# Altium PCB USB-eVo.PcbDoc
Units mm, origin at the board's own origin, x right, y up, seen from the top; angles counter-clockwise.
Board outline 40 x 16 mm, 2 copper layers (Top Layer, Bottom Layer), stack 1.595 mm thick; 20 components, 25 nets, 102 pads, 330 vias.
Unrouted connection lines stored in the file: 1.
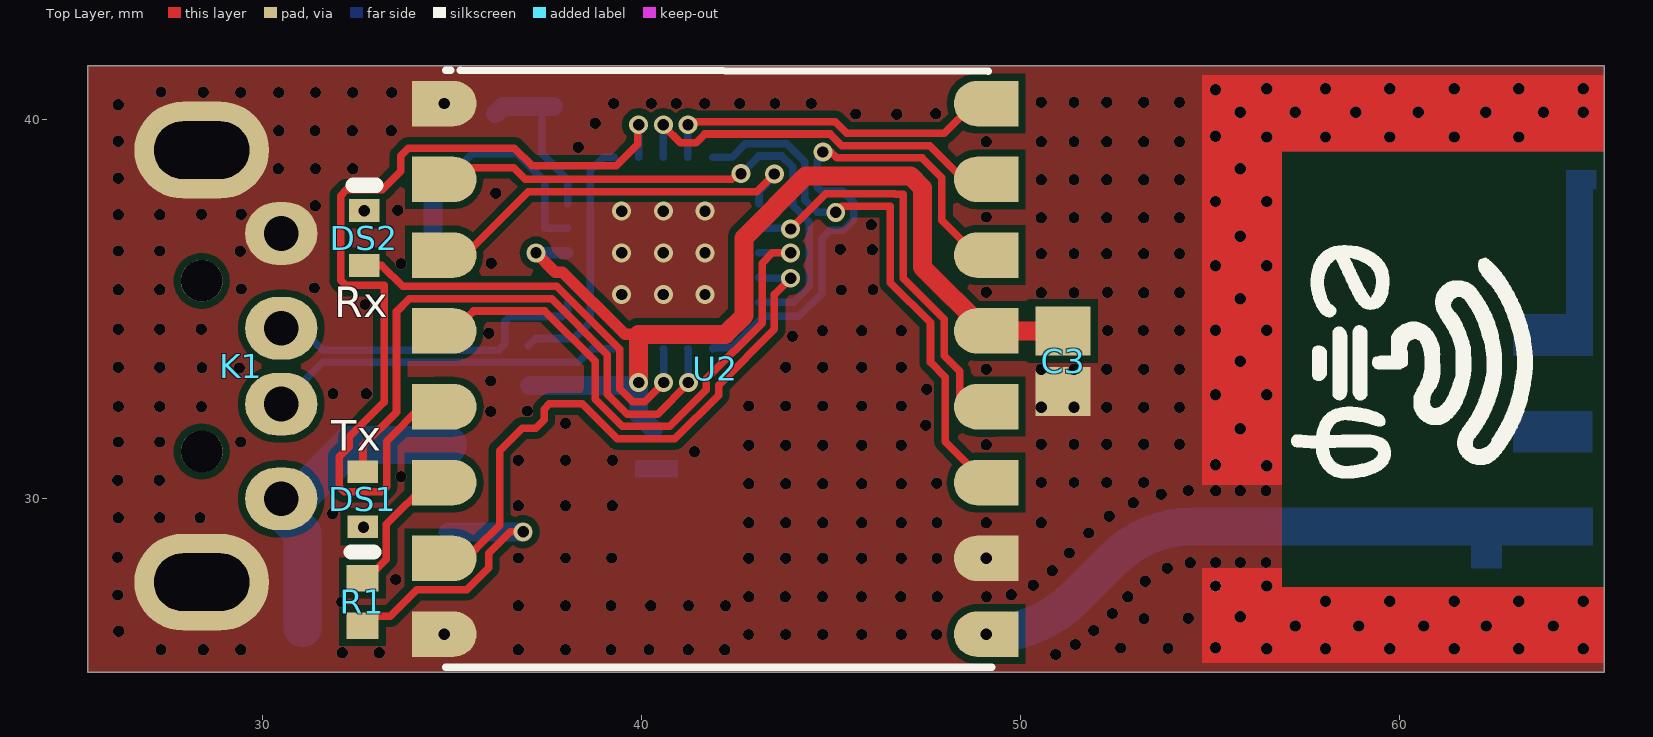
[diagram p0: Top Layer view]
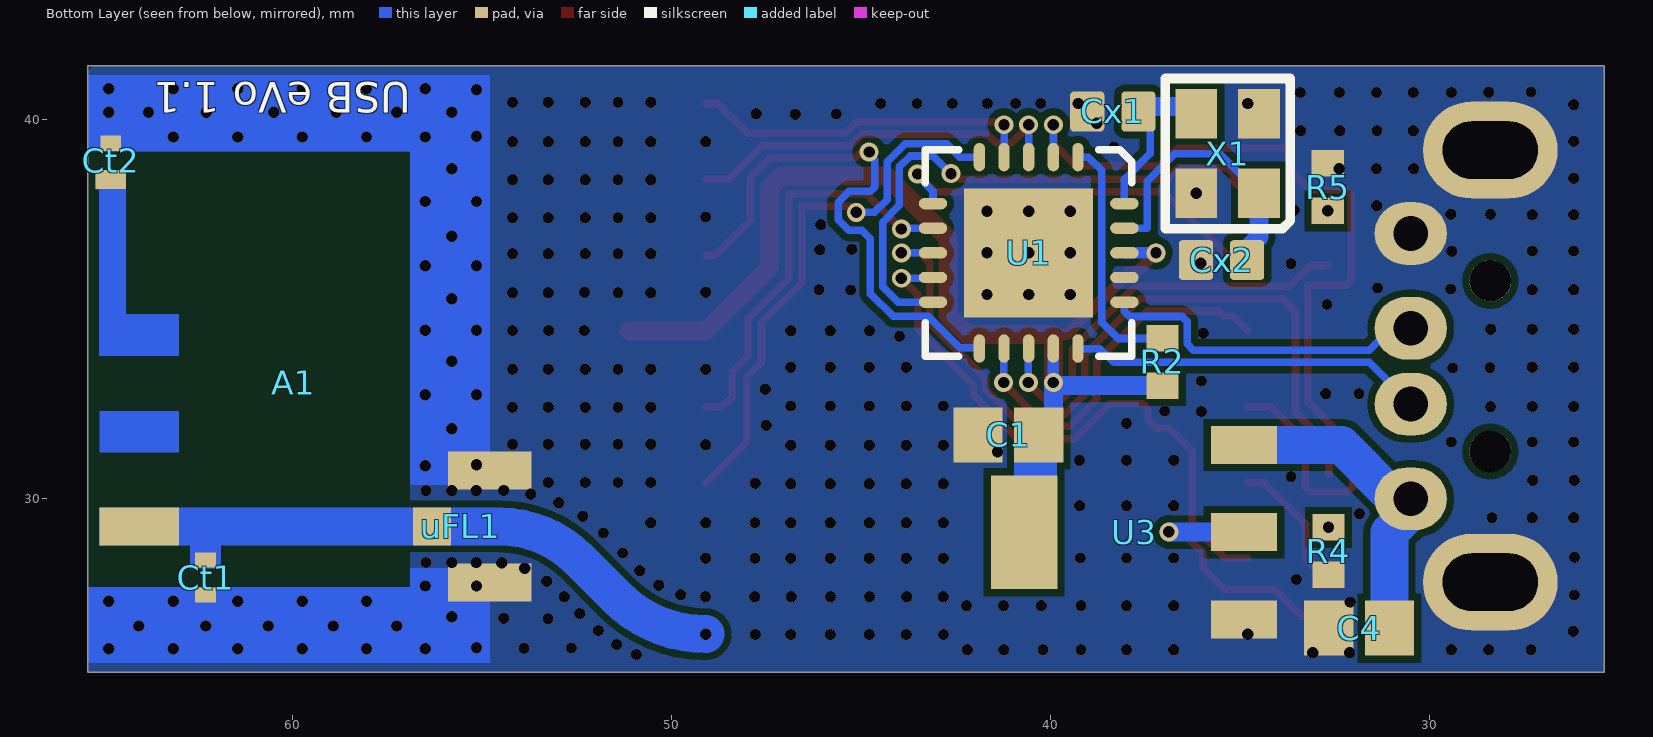
[diagram p1: Bottom Layer view, seen from below]

## Layer stack, top to bottom
Top Solder: solder mask 0.0254, Solder Resist, Dk 3.5
Top Layer: signal copper 0.0356
Dielectric 1: core 1.524, FR-4, Dk 4.6
Bottom Layer: signal copper 0.0356
Bottom Solder: solder mask 0.0254, Solder Resist, Dk 3.5

## Board outline
25.4,25.4 65.4,25.4 65.4,41.4 25.4,41.4

## Design rules (kind name [scope] priority, off if disabled: settings)
Clearance [All] p1: gap=0.125 ignorepadtopadclearanceinfootprint=FALSE except(0: Arc-Hole Track-Hole SMDPad-Hole THPad-Hole Via-Hole Fill-Hole Poly-Hole Region-Hole Text-Hole; 0.185: Arc-Poly Track-Poly SMDPad-Poly THPad-Poly Via-Poly Fill-Poly Poly-Poly)
ComponentClearance ComponentClearance_1 [All] p2: gap=0.125 collisioncheckmode=3 verticalgap=0.254 showdistances=FALSE
FanoutControl Fanout_LCC [IsLCC] p1: bgadir=Out bgaviamode=Centered fanoutstyle=Auto fanoutdirection=Alternating viagrid=0.025 // Fanout_LCC (Default Rule)
FanoutControl Fanout_BGA [IsBGA] p2: bgadir=Out bgaviamode=Centered fanoutstyle=Auto fanoutdirection=Alternating viagrid=0.025 // Fanout_BGA (Default Rule)
FanoutControl Fanout_Small [(CompPinCount < 5)] p3: bgadir=Out bgaviamode=Centered fanoutstyle=Auto fanoutdirection=OutThenIn viagrid=0.025 // Fanout_Small (Default Rule)
FanoutControl Fanout_SOIC [IsSOIC] p4: bgadir=Out bgaviamode=Centered fanoutstyle=Auto fanoutdirection=Alternating viagrid=0.025 // Fanout_SOIC (Default Rule)
Height Height_1 [All] p2: minheight=0 maxheight=25.4 prefheight=12.7
HoleSize [All] p1: absolutevalues=TRUE maxlimit=2.54 minlimit=0.2 maxpercent=80.000 minpercent=20.000
MinimumSolderMaskSliver [All] p1: minsoldermaskwidth=0.05
PlaneConnect [All] p1: planeconnectstyle=Direct reliefexpansion=0.508 reliefentries=4 reliefconductorwidth=0.254 reliefairgap=0.254
PolygonConnect [All] p1: connectstyle=Direct reliefconductorwidth=0.254 reliefentries=4 polygonreliefangle="90 Angle" airgapwidth=0.254
RoutingVias [All] p1: holewidth=0.3 width=0.5 viastyle="Through Hole" minholewidth=0.2 minwidth=0.2 maxholewidth=1 maxwidth=1
SilkToBoardRegionClearance SilkToBoardRegionClearance_1 [All] p2:
SilkToSolderMaskClearance [IsPad] p1: minsilkscreentomaskgap=0.1 clearancetoexposedcopper=TRUE
SolderMaskExpansion [All] p1: expansion=0 istentingtop=FALSE
Width [All] p1: maxlimit=2 minlimit=0.2 preferedwidth=0.2
22 further rules are at their usual default settings.

## Components (designator, comment, footprint, x,y, rotation, side; value= is the part's Value field where it differs from the comment)
A1 "868/915 Mhz" M620720 65.1,28.75 r90 bottom locked
C1 "100nF" CAPC2013X88X50NL20T25 41.116,31.668 r180 bottom
C3 "100nF" CAPC2013X88X50NL20T25 51.13,33.61 r90 top
C4 "100nF" CAPC2013X88X50NL20T25 31.86,26.57 r180 bottom
Ct1 "47pF" SMD0402 62.295,27.904 r270 bottom
Ct2 "6.7pF" SMD0402 64.799,38.903 r270 bottom
Cx1 "30pF" PCB-EK4STCKT8HTL49C36KEC-1 38.36,40.2 r180 bottom
Cx2 "30pF" PCB-EK4STCKT8HTL49C36KEC-1 35.49,36.28 r180 bottom
DS1 "LED-0603" VISH-TLMX1100-2_V 32.65,29.97 r270 top
DS2 "LED-0603" VISH-TLMX1100-2_V 32.69,36.86 r90 top
K1 "USB-A" USB-A-H 28.4,33.48 r0 top locked
R1 "2k2" RESC1608X55X30LL15T15 32.64,27.26 r90 top
R2 "2k2" RESC1608X55X30LL15T15 37.05,33.59 r90 bottom
R4 "2k2" RESC1608X55X30LL15T15 32.67,28.6 r270 bottom
R5 "2k2" RESC1608X55X30LL15T15 32.69,38.205 r90 bottom
U1 "MCP2210" QFN-MQ20_N 40.58,36.47 r270 bottom locked
U2 "LoRa1276-C1" PCB-A2VA5FQQIKHNLZOD9I25-1 33.95,25.41 r0 top locked
U3 "AMS1117-3.3" MP04A_N 37.8,29.1 r0 bottom locked
uFL1 "50ohm" HRS-U.FL-R-SMT_V 54.8,29.25 r270 bottom
X1 "12Mhz" PCB-O7TDNPTWBJGDFBSKC48Q-1 35.33,39.09 r90 bottom locked

## Footprints (in the part's own frame and the unit in brackets; to place one, negate y for a bottom-side part, rotate by r counter-clockwise, add the part's x,y. Pads: shape width x height; smd on the part's side, far side on the other; paste and mask are expansions set on the pad)
CAPC2013X88X50NL20T25 [mm] "CAPC2013X88X50NL20T25"
  rect 1.3x1.45 smd: 1(-0.8,0) 2(0.8,0)
  body extent -1.1,-0.72 1.1,0.72, height 0.88
HRS-U.FL-R-SMT_V [mm] "SMD, 3-Leads, Body 2.6x2.6mm"
  rect 1x2.2 smd: 1(-1.475,0) 2(1.475,0)
  rect 1x1 smd: 3(0,-1.525)
  body extent -1.3,-1.3 1.3,1.3, height 1.25
M620720 [mm]
  rect 1x2.1 smd: 1(0.5,-1.05)
  rect 0.5x0.8 smd: 2(9.65,-0.3)
  round 0.3 hole 0.3 mask+0.102: GND(-1.07,-9.95) GND(2.13,-9.95)
  Top Layer region: 2.45,0 3.55,0 3.55,-2.1 2.45,-2.1
  Top Layer region: 9.4,0 9.9,0 9.9,-0.7 9.4,-0.7
  Top Layer region: 12.4,0.3 12.4,-10.3 1.6,-10.3 1.6,-8.2 10.4,-8.2 10.4,0.3
  Top Layer region: -3.1,0.3 -1.1,0.3 -1.1,-8.2 -0.6,-8.2 -0.6,-10.3 -3.1,-10.3
  Top Layer region: 5,0 9.4,0 9.4,0.1 9.9,0.1 9.9,0 9.9,-0.7 6.1,-0.7 6.1,-2.1 5,-2.1
  Top Layer region: 0,0 1,0 1,-7.7 0,-7.7 0,-3.2 -0.6,-3.2 -0.6,-2.4 0,-2.4
  Bottom Layer region: -1.1,0.3 -1.1,-8.2 -0.6,-8.2 -0.6,-10.3 -3.1,-10.3 -3.1,0.3
  Bottom Layer region: 1.6,-8.2 1.6,-10.3 12.4,-10.3 12.4,0.3 10.4,0.3 10.4,-8.2
  body extent -0.1,-2.2 6.2,0.1, height 1
MP04A_N [mm] "SOT223, 4-Leads, Body 6.5x3.5mm, Pitch 2.3mm, Lead Span 7mm, IPC Medium Density"
  rect 1.75x1 smd: 1(-2.9,2.3) 2(-2.9,0) 3(-2.9,-2.3)
  rect 1.75x3 smd: 2(2.9,0)
  body extent -3.53,-3.3 3.54,3.2, height 1.6
PCB-A2VA5FQQIKHNLZOD9I25-1 [mm]
  rect 0.85x1.2 smd: 1(0.42,14.999) 2(0.42,12.999) 3(0.42,10.999) 4(0.42,8.999) 5(0.42,6.999) 6(0.42,4.999) 7(0.42,2.999) 8(0.42,0.999) 9(15.574,0.999) 10(15.574,2.999) 11(15.574,4.999) 12(15.574,6.999) 13(15.574,8.999) 14(15.574,10.999) 15(15.574,12.999) 16(15.574,14.999)
  oval 1.7x1.2 smd: 1(0.85,15) 2(0.85,13) 3(0.85,11) 4(0.85,9) 5(0.85,7) 6(0.85,5) 7(0.85,3) 8(0.85,1) 9(15.15,1) 10(15.15,3) 11(15.15,5) 12(15.15,7) 13(15.15,9) 14(15.15,11) 15(15.15,13) 16(15.15,15)
  silkscreen extent 0.89,0.13 15.29,15.88, body extent 0,0 16,15.97, height 2.1
PCB-EK4STCKT8HTL49C36KEC-1 [mm] "RESC1609X50X30ML10T20"
  rrect20% 0.9x1.05 smd: 1(-0.675,0) 2(0.675,0)
  body extent -0.87,-0.48 0.87,0.48, height 0.87
PCB-O7TDNPTWBJGDFBSKC48Q-1 [mm] "Quartz Crystal, Body 5.0 x 3.2 mm, Height 1.05mm"
  rect 1.3x1.1 smd: 1(-1.05,-0.825) 2(1.05,-0.825) 3(1.05,0.825) 4(-1.05,0.825)
  silkscreen extent -1.98,-1.65 1.98,1.65, body extent -1.6,-1.25 1.6,1.25, height 1.2
QFN-MQ20_N [mm] "QFN, 20-Leads, Body 5x5mm, Pitch 0.65mm, Thermal Pad 3.4x3.4mm, IPC Medium Density"
  oval 0.75x0.3 smd: 1(-2.525,1.3) 2(-2.525,0.65) 3(-2.525,0) 4(-2.525,-0.65) 5(-2.525,-1.3) 11(2.525,-1.3) 12(2.525,-0.65) 13(2.525,0) 14(2.525,0.65) 15(2.525,1.3)
  oval 0.3x0.75 smd: 6(-1.3,-2.525) 7(-0.65,-2.525) 8(0,-2.525) 9(0.65,-2.525) 10(1.3,-2.525) 16(1.3,2.525) 17(0.65,2.525) 18(0,2.525) 19(-0.65,2.525) 20(-1.3,2.525)
  rect 3.4x3.4 smd: 21(0,0)
  silkscreen extent -2.73,-2.72 2.73,2.73, body extent -2.57,-2.57 2.58,2.58, height 1
RESC1608X55X30LL15T15 [mm] "RESC1608X55X30LL15T15"
  rect 0.7x0.85 smd: 1(-0.625,0) 2(0.625,0)
  body extent -0.87,-0.48 0.87,0.48, height 0.55
SMD0402 [mm]
  rect 0.4x0.55 smd: 1(-0.46,0) 2(0.46,0)
  body extent -0.5,-0.25 0.5,0.25, height 0.55
USB-A-H [mm] "USB-A-H"
  round 1.1 hole 1.1 unplated: 0(0,-2.25) 0(0,2.25)
  oval 1.905x1.651 hole 0.914: 1(2.1,-3.5) 2(2.1,-1) 3(2.1,1) 4(2.1,3.5)
  oval 3.556x2.556 hole 1.515 slot 2.515 at 0 deg: 5(0,-5.7) 5(0,5.7)
  body extent -17.79,-6.35 2.23,6.35, height 4.53
VISH-TLMX1100-2_V [mm] "SMD, 2-Leads, Body 1.6x0.8mm"
  rect 0.6x0.8 smd: 1(-0.725,0) 2(0.725,0)
  silkscreen extent 1.39,-0.31 1.39,0.29, body extent -0.8,-0.4 0.8,0.4, height 0.65

## Part data
A1: library part M620720, "ISM 868/900MHz (6x2x1.08mm) - Antenna"
C1 C3 C4: library part CAP-0805, "Ceramic Capacitor SMT 0805"
Ct1 Ct2: library part CAP-0402, "Ceramic Capacitor SMT 0402"
Cx1 Cx2: library part CAP-0603, "Ceramic Capacitor SMT 0603"
DS1 DS2: "LED SMD 0603"
K1: library part USB-2.0-TYPE-A, "Conn USB 2.0 Type A PL 4 POS 2mm/2.5mm Solder RA Thru-Hole 4 Terminal 1 Port Tray"
R1 R2 R4 R5: library part RES-0603, "Thick Film Resistors - SMD 0603", Mounting Style="Surface Mount"
U1: "USB-to-SPI Protocol Converter with GPIO (Master Mode), 20-Pin QFN, Industrial Temperature", Manufacturer Part Number=MCP2210-I/MQ, Data Rate="12000000.0 bps", Lead-Free Status="Lead Free", Lifecycle Status=Active, Mounting Style="Surface Mount", Number of Pins=20, RoHS=Compliant
U2: library part NICERF-1276-C1
U3: library part AMS1117, "SOT223 1-Amp 3.3-Volt Low Drop Out Voltage Regulatator"
uFL1: library part uFL, "Ultra Small Surface Mount Coaxial Connector, 50 Ohm"
X1: library part CRYSTAL, "Crystal 32.0000mhz 18pf Smd"

## Via types
v1: diameter 0.3, hole 0.3, Top Layer to Bottom Layer, tented both sides, 306 vias
v2: diameter 0.5, hole 0.3, Top Layer to Bottom Layer, tented both sides, 16 vias
v3: diameter 0.5, hole 0.3, Top Layer to Bottom Layer, tented top, 8 vias

## Nets (pads, with @x,y where several pads share a name; then routed paths per layer and width w, separated by ;. In a path a pad name is that pad's centre, name@x,y a point inside that pad or via, vN(x,y) a via of type N, cw(c..) or ccw(c..) an arc to the next point about the centre after c; other vN are vias at no path point)
3.3V: C1.2 C3.2 R1.1 R2.1 U1.14 U1.18 U2.13 U3.2 | length 35.4
  Top Layer w0.2: R1.1 32.89,26.885 33.375,26.885 34.074,27.584 35.391,27.584 35.97,28.163 35.97,28.54 36.54,29.11 v2(36.88,29.11)
  Top Layer w0.3: v2(37.22,36.47) 37.73,35.96 37.92,35.96 38.72,35.16 38.73,35.16 39.57,34.32 39.93,34.32
  Top Layer w0.5: v2(39.93,33.05) 39.93,34.32 42.218,34.32 42.71,34.812 42.71,36.866 44.344,38.5 47.102,38.5 47.415,38.187 47.415,36.095 49.1,34.41 C3.2
  Bottom Layer w0.2: C1.2 C1.2@40.41,31.574
  Bottom Layer w0.3: v2(37.22,36.47) U1.18 ; v2@39.93,33.25 U1.14
  Bottom Layer w0.5: U3.2@34.9,29.1 v2@36.88,29.1 ; R2.1 38.875,32.965 ; 38.88,32.96 38.875,32.965 ; C1.2@40.317,31.82 39.93,32.207 v2(39.93,33.05) 39.845,32.965 38.875,32.965
GND: A1.GND C1.1 C3.1 C4.1 Ct1.2 Ct2.1 Cx1.1 Cx2.1 K1.4 K1.5 R4.2 R5.2 U1.17 U1.21 U2.1 U2.8 U2.10 U3.1 uFL1.1 uFL1.2 X1.2 X1.4
  other v1: 50.937,25.871 32.107,25.914 33.083,25.917 27.327,26 28.445,26 29.43,26 36.75,26 38,26 39.2,26 40.204,26 41.234,26 42.2,26 52.652,26.044 53.896,26.039 56.5,26.025 58.05,26.025 59.75,26.025 61.45,26.025 63.15,26.025 64.85,26.025 55.15,26.05 51.453,26.137 42.827,26.4 43.81,26.4 44.79,26.4 45.82,26.4 46.86,26.4 47.798,26.4 34.8,26.41 26.213,26.481 51.934,26.505 57.254,26.625 58.925,26.625 60.643,26.625 62.298,26.625 64.057,26.625 53.263,26.82 54.427,26.829 55.8,26.866 52.426,26.956 36.75,27.16 38,27.16 39.2,27.16 40.244,27.16 41.244,27.16 42.22,27.16 32.1,27.257 58.05,27.275 59.75,27.275 61.45,27.275 63.15,27.275 64.85,27.275 42.838,27.4 43.799,27.4 44.779,27.4 45.809,27.4 46.849,27.4 47.803,27.4 49.107,27.4 52.835,27.4 26.18,27.442 49.757,27.445 56.5,27.68 50.339,27.702 53.292,27.803 33.523,27.852 50.844,28.085 53.873,28.149 54.486,28.292 55.16,28.3 55.8,28.3 56.48,28.3 36.75,28.42 38,28.42 39.22,28.42 42.838,28.41 43.81,28.41 44.79,28.41 45.82,28.41 46.86,28.41 47.8,28.41 49.1,28.41 26.18,28.436 51.294,28.55 51.804,29.078 42.838,29.35 43.81,29.35 44.79,29.35 45.82,29.35 46.86,29.35 47.801,29.35 49.1,29.35 50.55,29.35 26.201,29.48 27.291,29.48 28.356,29.48 52.343,29.517 31.85,29.59 36.75,29.8 38,29.8 39.23,29.8 52.978,29.878 53.717,30.099 54.432,30.198 55.16,30.19 55.8,30.19 56.48,30.19 42.838,30.38 43.81,30.38 44.79,30.38 45.82,30.38 46.86,30.38 47.796,30.387 50.55,30.41 51.416,30.41 52.282,30.41 53.252,30.41 26.19,30.467 27.28,30.467 33.66,30.56 56.5,30.85 36.75,31 38,31 39.24,31 41.404,31.225 42.838,31.39 43.81,31.39 44.79,31.39 45.82,31.39 46.86,31.39 49.1,31.403 50.55,31.42 51.416,31.42 52.282,31.42 53.252,31.42 54.2,31.42 26.201,31.48 27.291,31.48 29.429,31.48 55.8,31.831 47.501,31.92 38,31.97 36.023,32.285 36.99,32.296 26.201,32.417 27.291,32.417 28.395,32.411 50.55,32.4 51.416,32.4 52.282,32.4 53.252,32.4 54.2,32.4 42.838,32.43 43.81,32.43 44.79,32.43 45.82,32.43 46.86,32.43 55.15,32.725 56.5,32.725 31.864,32.75 32.743,32.75 47.526,32.868 36.023,33.09 49.1,33.398 50.55,33.4 51.416,33.4 52.282,33.398 53.252,33.4 54.2,33.4 29.394,33.433 26.201,33.447 27.291,33.447 28.409,33.441 43.81,33.45 44.79,33.45 45.82,33.45 46.86,33.45 55.8,33.609 43.988,34.27 35.974,34.353 44.78,34.41 45.82,34.41 46.86,34.41 52.307,34.42 53.241,34.42 54.2,34.42 55.15,34.425 56.5,34.425 26.201,34.457 27.291,34.457 28.385,34.458 32.709,35.108 55.8,35.26 50.55,35.42 51.416,35.42 53.252,35.42 54.2,35.42 49.1,35.427 52.299,35.427 45.27,35.49 26.201,35.497 27.291,35.497 29.441,35.516 46.114,35.497 31.374,35.543 55.15,36.125 56.5,36.125 33.659,36.179 36.038,36.2 50.55,36.45 51.416,36.45 52.282,36.45 53.252,36.45 54.2,36.45 26.201,36.517 27.291,36.517 29.419,36.515 45.25,36.56 46.091,36.554 55.8,36.911 46.07,37.21 50.55,37.4 51.416,37.4 52.282,37.4 53.252,37.4 54.2,37.4 49.1,37.416 26.201,37.477 27.291,37.477 28.395,37.485 29.444,37.489 33.57,37.592 31.395,37.714 55.15,37.825 56.5,37.825 36.155,38.04 50.55,38.4 51.416,38.4 52.282,38.4 53.252,38.4 54.2,38.4 26.201,38.438 30.419,38.69 31.402,38.69 32.382,38.69 55.8,38.689 38.34,39.26 49.1,39.404 50.55,39.4 51.416,39.4 52.282,39.4 53.252,39.4 54.2,39.4 26.201,39.414 56.5,39.525 58.05,39.525 59.75,39.525 61.45,39.525 63.15,39.525 55.15,39.55 30.43,39.69 31.39,39.69 32.37,39.69 33.4,39.69 38.782,39.885 45.659,40.132 46.737,40.123 47.77,40.135 55.8,40.175 57.251,40.175 58.85,40.175 60.501,40.175 62.279,40.175 63.803,40.175 64.85,40.175 26.201,40.374 34.8,40.41 39.276,40.41 40.257,40.41 40.918,40.41 41.673,40.41 42.597,40.41 43.527,40.41 44.487,40.41 50.55,40.44 51.416,40.44 52.282,40.44 53.252,40.44 54.2,40.44 29.43,40.699 30.43,40.7 31.402,40.7 32.382,40.7 33.412,40.7 27.327,40.714 28.445,40.708 55.15,40.775 56.5,40.8 58.05,40.8 59.75,40.8 61.45,40.8 63.15,40.8 64.849,40.804
  other v2: 39.48,37.57
  other v3: 39.48,35.37 40.58,35.37 41.68,35.37 39.48,36.47 40.58,36.47 41.68,36.47 40.58,37.57 41.68,37.57
NetA1_1: A1.1 Ct1.1 U2.9 uFL1.3 | length 13.5
  Bottom Layer w0.334: 54.533,29.25 58.1,29.25
  Bottom Layer w1: v1(49.1,26.41) ccw(c49.1,29.742) 51.456,27.386 52.46,28.39 cw(c54.533,26.317) 54.533,29.249 ; 54.533,29.25 58.1,29.25
NetA1_2: A1.2 Ct2.2
NetC4_2: C4.2 K1.1 U3.3 | length 8.6
  Bottom Layer w1: C4.2 31.06,29.09 30.5,29.65 K1.1 30.91,29.98 32.33,31.4 U3.3
NetCx1_2: Cx1.2 U1.20 X1.3 | length 4.1
  Bottom Layer w0.2: Cx1.2@37.368,40.009 37.368,39.092 38.055,38.405 U1.20
  Bottom Layer w0.5: X1.3 36.345,40.33 36.465,40.33 Cx1.2@37.685,40.33
NetCx2_2: Cx2.2 U1.19 X1.1 | length 7
  Bottom Layer w0.2: X1.1 35.545,39.08 36.73,39.08 37.455,38.355 37.455,37.12 U1.19
  Bottom Layer w0.5: X1.1 34.505,36.89 Cx2.2@34.76,36.635
NetDS1_1: DS1.1 U1.12 | length 15.4
  Top Layer w0.2: DS1.1@32.655,30.635 32.655,31.385 33.54,32.27 33.54,34.922 33.877,35.259 35.023,35.259 35.024,35.26 37.63,35.26 39.105,33.785 39.105,32.744 39.634,32.215 40.427,32.215 v2@41.24,33.028
  Bottom Layer w0.2: U1.12 41.24,33.935 v2@41.24,33.24
  other v2: 41.24,33.05
NetDS1_2: DS1.2 R4.1
  other v1: 32.67,29.225
NetDS2_1: DS2.1 U1.13 | length 11.3
  Top Layer w0.2: DS2.1@32.673,36.137 33.153,36.137 ; DS2.1@32.78,36.13 33.155,36.13 33.701,35.584 34.889,35.584 34.89,35.585 37.765,35.585 39.43,33.92 39.43,32.878 39.768,32.54 40.092,32.54 v2@40.59,33.038
  Bottom Layer w0.2: U1.13 40.59,33.935 v2@40.59,33.25
  other v2: 40.59,33.05
NetDS2_2: DS2.2 R5.1
  other v1: 32.69,37.58
NetK1_2: K1.2 U1.15 | length 9.4
  Bottom Layer w0.2: K1.2 31.6,33.58 38.338,33.58 38.703,33.945 U1.15
NetK1_3: K1.3 U1.16 | length 8.8
  Bottom Layer w0.2: K1.3 31.02,34.48 31.595,33.905 36.235,33.905 36.4,34.07 36.4,34.658 36.532,34.79 37.568,34.79 37.91,34.79 38.055,34.935 U1.16@38.055,35.16
NetR1_2: R1.2 U2.6 | length 3.7
  Top Layer w0.2: R1.2 32.775,27.885 33.275,28.385 33.275,29.313 34.372,30.41 U2.6@34.8,30.41
NetR2_2: R2.2 U1.1 | length 6.7
  Bottom Layer w0.2: R2.2@37.02,34.015 37.215,34.21 38.22,34.21 38.655,34.645 38.655,38.645 39.005,38.995 U1.1
NetU1_2: U1.2 U2.5 | length 24.2
  Top Layer w0.2: U2.5@34.8,32.41 34.186,32.41 33.278,31.502 33.278,30.304 33.143,30.17 32.157,30.17 32.025,30.302 32.025,31.088 32.293,31.357 32.293,31.613 33.215,32.535 33.215,35.61 32.197,35.61 32.065,35.742 32.065,37.978 32.217,38.13 33.16,38.13 33.65,38.62 33.65,39.032 33.853,39.235 36.645,39.235 37.115,38.765 39.336,38.765 39.908,39.337 39.908,39.85 39.93,39.828 v2(39.93,39.85)
  Bottom Layer w0.2: U1.2 v2(39.93,39.85)
NetU1_3: U1.3 U2.15 | length 10.2
  Top Layer w0.2: v2(40.58,39.85) 40.58,39.828 41.033,39.375 41.447,39.375 41.677,39.605 44.987,39.605 45.292,39.3 47.61,39.3 48.5,38.41 U2.15@49.1,38.41
  Bottom Layer w0.2: U1.3 v2(40.58,39.85)
NetU1_4: U1.4 U2.16 | length 9.2
  Top Layer w0.2: v2(41.23,39.85) 41.31,39.93 45.121,39.93 45.425,39.626 47.996,39.626 48.78,40.41 U2.16@49.1,40.41
  Bottom Layer w0.2: U1.4 v2(41.23,39.85)
NetU1_5: U1.5 U2.11 | length 14.6
  Top Layer w0.2: v2(45.13,37.54) 45.29,37.7 46.57,37.7 46.57,35.68 47.63,34.62 47.63,33.581 48.02,33.191 48.02,31.49 U2.11@49.1,30.41
  Bottom Layer w0.2: U1.5 42.393,38.995 42.748,39.35 43.841,39.35 44.315,38.876 44.315,37.874 44.649,37.54 v2(45.13,37.54)
NetU1_6: U1.6 U2.3 | length 10.5
  Top Layer w0.2: U2.3@34.8,36.41 35.34,36.41 37.015,38.085 43.045,38.085 v2(43.51,38.55)
  Bottom Layer w0.2: U1.6 43.105,38.095 43.51,38.5 v2(43.51,38.55)
NetU1_7: U1.7 U2.12 | length 11
  Top Layer w0.2: v2(43.94,37.1) 44.865,38.025 46.705,38.025 46.71,38.02 46.91,38.02 46.91,35.8 47.99,34.72 47.99,33.752 48.4,33.342 48.4,32.67 48.66,32.41 U2.12@49.1,32.41
  Bottom Layer w0.2: U1.7 43.92,37.12 v2(43.94,37.1)
NetU1_8: U1.8 U2.4 | length 15
  Top Layer w0.2: U2.4@34.8,34.41 35.2,34.81 35.447,34.81 35.572,34.935 37.455,34.935 38.78,33.61 38.78,32.609 39.499,31.89 40.752,31.89 41.715,32.853 41.715,33.145 43.185,34.615 43.185,36.195 43.46,36.47 v2(43.94,36.47)
  Bottom Layer w0.2: U1.8 v2(43.94,36.47)
NetU1_9: U1.9 U2.7 | length 15.8
  Top Layer w0.2: U2.7@34.8,28.41 35.39,28.41 35.645,28.665 35.645,28.675 36.259,29.289 36.259,31.249 36.855,31.845 37.215,31.845 37.435,32.065 37.435,32.345 37.575,32.485 38.445,32.485 39.364,31.565 40.886,31.565 42.04,32.719 42.04,32.98 43.51,34.45 43.51,35.37 v2(43.94,35.8)
  Bottom Layer w0.2: U1.9 43.125,35.8 v2(43.94,35.8)
NetU1_10: U1.10 U2.2 | length 14.6
  Top Layer w0.2: U2.2@35.02,38.41 35.325,38.715 36.635,38.715 36.94,38.41 42.39,38.41 42.44,38.46 v2@42.63,38.46
  Top Layer w0.5: U2.2@34.8,38.41 U2.2@35.02,38.41
  Bottom Layer w0.2: v2(42.63,38.56) 43.095,39.025 43.707,39.025 43.99,38.742 43.99,37.722 44.43,37.282 44.43,35.58 44.02,35.17 U1.10
NetU1_11: U1.11 U2.14 | length 14.7
  Top Layer w0.2: v2(44.79,39.13) 45,39.13 45.155,38.975 47.405,38.975 47.93,38.45 47.93,37.33 48.85,36.41 U2.14@49.1,36.41
  Bottom Layer w0.2: U1.11 41.905,33.97 42.4,33.97 43.225,34.795 44.155,34.795 44.755,35.395 44.755,36.84 44.98,37.065 45.327,37.065 45.605,37.343 45.605,37.805 45.32,38.09 44.757,38.09 44.64,38.207 44.64,38.915 44.79,39.065 v2(44.79,39.13)
pads on no net: K1.0

## Polygon pours and split planes (outlines as drawn)
GND on Bottom Layer "Bottom Layer-No Net" (solid, remove dead copper, pour order 6): 65.4,41.4 25.4,41.4 25.4,25.4 65.4,25.4 65.4,27.65 56.9,27.65 56.9,39.15 65.4,39.15
GND on Top Layer "Top Layer-No Net" (solid, remove dead copper, pour order 4): 65.4,39.15 65.4,41.4 25.4,41.4 25.4,25.4 65.4,25.4 65.4,27.65 56.9,27.65 56.9,39.15

## Other copper
Bottom Layer:
  rectangle net 3.3V: 39.827,30.539 40.964,31.01

## Silkscreen, mask and mechanical layers (free items; w line width, h text height)
Top Overlay:
  drawing of 1589 lines, arcs and shapes, not listed
  text "Rx" at 31.9,34.77 h0.8
  text "Tx" at 31.82,31.25 h0.8
Bottom Overlay:
  text "USB eVo 1.1" at 56.88,40.97 h0.8 r180
Outline:
  lines w0.1: 65.4,41.4 25.4,41.4 25.4,25.4 65.4,25.4 65.4,41.4 ; 65.4,41.4 65.4,41.4